# Altium PCB TempRFOut.PcbDoc
Units mm, origin at the board's own origin, x right, y up, seen from the top; angles counter-clockwise.
Board outline 8 x 31 mm, 4 copper layers (Top Layer, Internal 1, Internal 2, Bottom Layer), stack 1.604 mm thick; 7 components, 11 nets, 32 pads, 2 vias.
Unrouted connection lines stored in the file: 3.
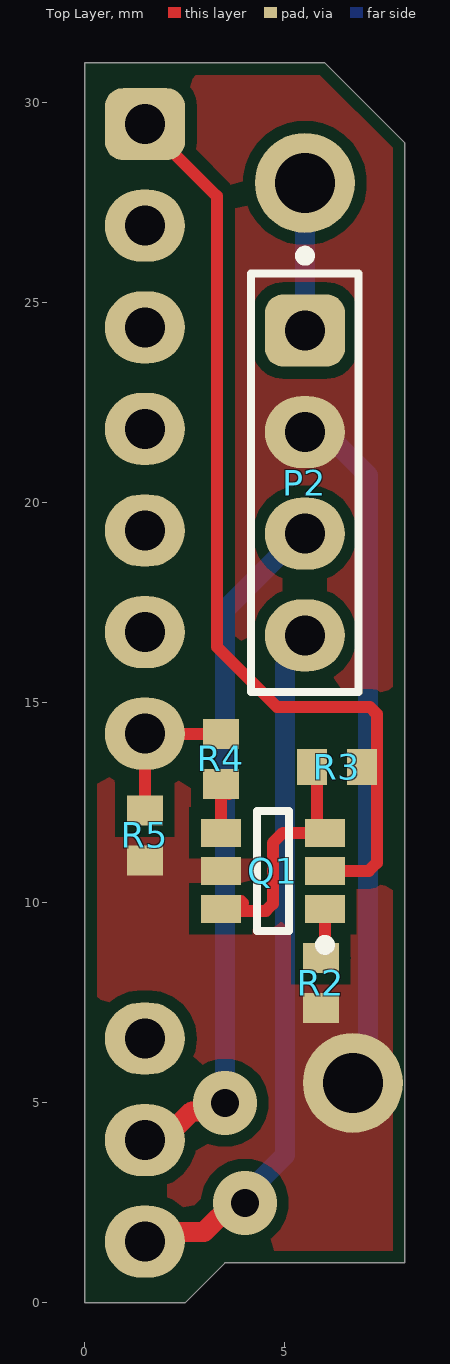
[diagram p0: Top Layer view]
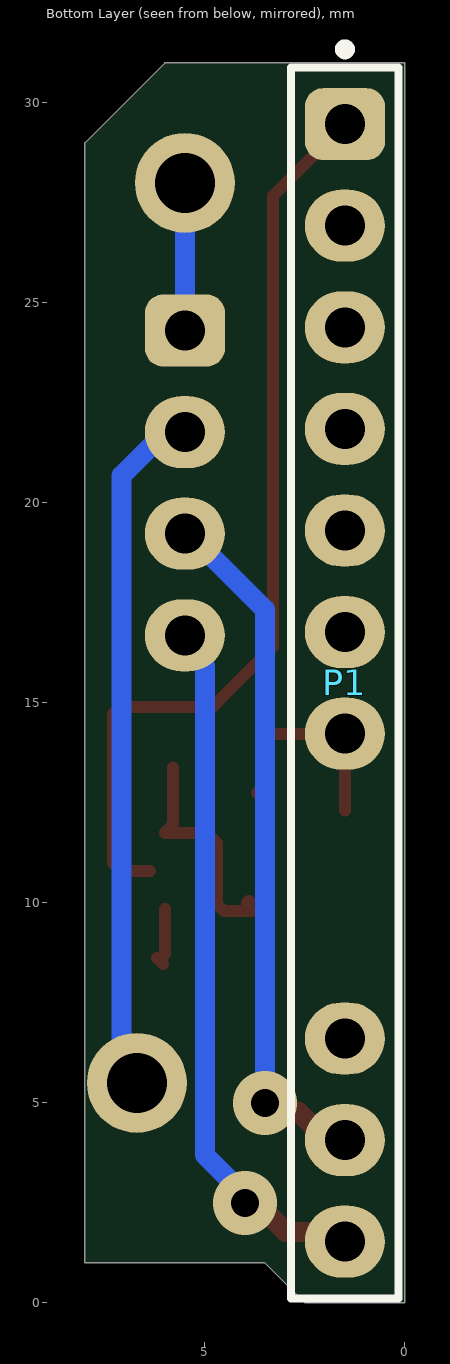
[diagram p1: Bottom Layer view, seen from below]

## Layer stack, top to bottom
Top Solder: solder mask 0.01, Solder Resist, Dk 3.5
Top Layer: signal copper 0.035
Dielectric 3: prepreg 0.075, PP-006, Dk 4.1
Internal 1: signal copper 0.017
Dielectric 1: dielectric 1.35, FR-4, Dk 4.8
Internal 2: signal copper 0.017
Dielectric 4: prepreg 0.075, PP-006, Dk 4.1
Bottom Layer: signal copper 0.035
Bottom Solder: solder mask 0.01, Solder Resist, Dk 3.5

## Board outline
2.5,0 3.5,1 8,1 8,29 6,31 0,31 0,0

## Design rules (kind name [scope] priority, off if disabled: settings)
BoardOutlineClearance [All] p1: gap=0.3 ignorepadtopadclearanceinfootprint=FALSE
Clearance Clearance_3 [All] p1: gap=0.2 ignorepadtopadclearanceinfootprint=FALSE except(0.3: Arc-Fill Arc-Poly Arc-Region Track-Fill Track-Poly Track-Region SMDPad-Fill SMDPad-Poly SMDPad-Region THPad-Fill THPad-Poly THPad-Region Via-Fill Via-Poly Via-Region Fill-Fill Fill-Poly Fill-Region Poly-Poly Poly-Region Region-Region)
ComponentClearance [All] p1: gap=0.1 collisioncheckmode=3 verticalgap=0.254 showdistances=FALSE
DiffPairsRouting [All] p1: maxlimit=0.254 minlimit=0.152 mostfreqgap=0.254 toplayer_prefgap=0.2 toplayer_minwidth=0.152 toplayer_maxwidth=0.381 toplayer_prefwidth=0.152 midlayer1_mingap=0.254 midlayer1_minwidth=0.381 midlayer1_maxwidth=0.381 midlayer1_prefwidth=0.381 midlayer2_mingap=0.254 midlayer2_minwidth=0.381 midlayer2_maxwidth=0.381 midlayer2_prefwidth=0.381 bottomlayer_prefgap=0.2 bottomlayer_minwidth=0.152 bottomlayer_maxwidth=0.381 bottomlayer_prefwidth=0.152 maxuncoupledlength=12.7
HoleSize [All] p1: absolutevalues=TRUE maxlimit=5 minlimit=0.025 maxpercent=80.000 minpercent=20.000
MinimumSolderMaskSliver [All] p1 off: minsoldermaskwidth=0.254
PasteMaskExpansion [All] p1: expansion=-0.05
PlaneClearance [All] p1: clearance=0.5
PlaneConnect [All] p1: planeconnectstyle=Direct reliefexpansion=0.508 reliefentries=4 reliefconductorwidth=0.254 reliefairgap=0.254
PolygonConnect [All] p1: connectstyle=Direct reliefconductorwidth=0.5 reliefentries=4 polygonreliefangle="90 Angle" airgapwidth=0.2
RoutingVias [All] p1: holewidth=0.3 width=0.6 viastyle="Through Hole" minholewidth=0.3 minwidth=0.52 maxholewidth=5 maxwidth=5
SilkToSilkClearance [All] p1 off: silktosilkclearance=0.254
SilkToSolderMaskClearance [IsPad] p1 off: minsilkscreentomaskgap=0.254 clearancetoexposedcopper=TRUE
SolderMaskExpansion [All] p1 off: expansion=0.102 istentingtop=FALSE
SupplyNets "Schematic Supply Nets_3" [InNet('VBAT')] p1: voltage=0.000
SupplyNets "Schematic Supply Nets_1" [InNet('3V3')] p2: voltage=0.000
SupplyNets "Schematic Supply Nets" [InNet('GND')] p3: voltage=0.000
UnRoutedNet [All] p1: checkbadconnections=TRUE
Width [All] p1: maxlimit=5 minlimit=0.3 preferedwidth=0.5
20 further rules are at their usual default settings.

## Components (designator, comment, footprint, x,y, rotation, side; value= is the part's Value field where it differs from the comment)
P1 "61301211121" 61301211121 1.5,15.5 r270 bottom
P2 "61300411121" 61300411121 5.5,20.5 r270 top
Q1 "DMC2700UDM-7" FAIR-SOT23-6_V 4.7,10.8 r180 top
R2 "120k" 0603 5.9,8 r90 top
R3 "120k" 0603 6.3,13.4 r0 top
R4 "15k" 0603 3.4,13.6 r270 top
R5 "15k" 0603 1.5,11.69 r90 top

## Footprints (in the part's own frame and the unit in brackets; to place one, negate y for a bottom-side part, rotate by r counter-clockwise, add the part's x,y. Pads: shape width x height; smd on the part's side, far side on the other; paste and mask are expansions set on the pad)
0603 [mm] "IPC High Density"
  rect 0.75x0.9 smd: 1(-0.625,0) 2(0.625,0)
  body extent -0.87,-0.48 0.87,0.48, height 0.92
61300411121 [mm] "Pin Header, pitch 2.54 mm, THT, Vertical, single row, 4p"
  rrect50% 1.8x2 hole 1: 1(-3.81,0)
  oval 1.8x2 hole 1: 2(-1.27,0) 3(1.27,0) 4(3.81,0)
  silkscreen extent -5.8,-1.35 5.23,1.35, body extent -5.08,-1.27 5.08,1.27, height 8.57
61301211121 [mm] "Pin Header, pitch 2.54 mm, THT, Vertical, single row, 12p"
  rrect50% 1.8x2 hole 1: 1(-13.97,0)
  oval 1.8x2 hole 1: 2(-11.43,0) 3(-8.89,0) 4(-6.35,0) 5(-3.81,0) 6(-1.27,0) 7(1.27,0) 10(8.89,0) 11(11.43,0) 12(13.97,0)
  round 0 all layers, no hole: 8(3.81,0) 9(6.35,0)
  silkscreen extent -15.96,-1.35 15.39,1.35, body extent -15.24,-1.27 15.24,1.27, height 8.57
FAIR-SOT23-6_V [mm] "SOT23, 6-Leads, Body 2.9x1.6mm, Pitch 0.95mm"
  rect 1x0.7 smd: 1(-1.3,0.95) 2(-1.3,0) 3(-1.3,-0.95) 4(1.3,-0.95) 5(1.3,0) 6(1.3,0.95)
  silkscreen extent -1.43,-1.5 0.4,1.97, body extent -1.4,-1.45 1.4,1.45, height 1.45

## Part data
P1: library part CMP-1502-01086-4, "THT Vertical Pin Header WR-PHD, Pitch 2.54 mm, Single Row, 12 pins", Color=Black, Contact Resistance=20mΩ, Current Rating=3A, Operating Supply Voltage=250V, Connector Type="Male Pin", Contact Material=Copper, Contact Mating Length=5.9944mm, Contact Plating=Gold, Gender=Male, Lead Pitch=2.54mm, Mount="Through Hole", Number of Contacts=12, Number of Pins=12, Number of Positions=12, Number of Rows=1, Orientation=Vertical, Packaging=Bulk, Pitch=2.54mm, RoHS=Compliant, Termination=Solder
P2: library part CMP-1502-01064-4, "THT Vertical Pin Header WR-PHD, Pitch 2.54 mm, Single Row, 4 pins", Color=Black, Contact Resistance=20mΩ, Current Rating=3A, Max Operating Temperature=105°C, Min Operating Temperature=-40°C, Operating Supply Voltage=250V, Connector Type="Male Pin", Contact Material=Gold, Contact Mating Length=5.9944mm, Contact Plating=Gold, Gender=Male, Height=8.89mm, Lead Free="Lead Free", Lead Pitch=2.54mm, Mount="Through Hole", Number of Contacts=4, Number of Pins=4, Number of Positions=4, Number of Rows=1, Orientation=Vertical, Packaging=Bulk, Pitch=2.54mm, RoHS=Compliant, Termination=Solder, Voltage Rating=250V
Q1: library part CMP-2000-04939-1, "Dual N & P-Channel 2.5 V Specified PowerTrench(TM) MOSFET, -55 to 150 degC, 6-Pin SOT-23, RoHS, Tape and Reel", Manufacturer=Fairchild, Maximum Continuous Drain Current=2.7@NChannel, Maximum Drain Source Voltage=20V, Maximum Gate Source Voltage=±8V, Operating Temperature=-55to150degC, Package=6SuperSOT, Package Description="6-Pin Small Outline Transistor, Body 2.9 x 1.6 mm, Pitch 0.95 mm", Package Reference=SOT23-6, Package Version="Rev. 5, 05/2015", Category=MOSFET, Channel Mode=Enhancement, Channel Type=N, Datasheet URL=https://www.fairchildsemi.com/datasheets/FD/FDC6327C.pdf, Datasheet Version="Rev. E, 07/2000", Manufacturer URL=https://www.fairchildsemi.com/, Mounting=SurfaceMount, Package URL=https://www.fairchildsemi.com/package-drawings/MA/MA06A.pdf, Packaging=Tape&Reel, Rad Hard=No, RDS-on=80@4.5V@NChannel, Typical Fall Time=3@NChannel, Typical Rise Time=9@NChannel, Typical Turn-Off Delay Time=12@NChannel, Typical Turn-On Delay Time=5@NChannel
R2 R3 R4 R5: library part R, "Resistor", ComponentLink1Description=http://www.yageo.com/documents/recent/PYu-RC_Group_51_RoHS_L_7.pdf, ComponentLink1URL=http://www.yageo.com/documents/recent/PYu-RC_Group_51_RoHS_L_7.pdf

## Free pads (board coordinates)
  round 2.5 hole 1.5: 10(5.5,28) 10(6.7,5.5)

## Via types
v1: diameter 1.6, hole 0.7, Top Layer to Bottom Layer, 2 vias

## Nets (pads, with @x,y where several pads share a name; then routed paths per layer and width w, separated by ;. In a path a pad name is that pad's centre, name@x,y a point inside that pad or via, vN(x,y) a via of type N, cw(c..) or ccw(c..) an arc to the next point about the centre after c; other vN are vias at no path point)
3V3: P2.1 pad.10@5.5,28 | length 3.7
  Bottom Layer w0.5: P2.1 pad.10@5.5,28
"5 ENABLE": P1.10 Q1.1 R2.2 | length 1.3
  Top Layer w0.3: R2.2@6,8.725 Q1.1 ; R2.2@6.05,8.475 R2.2@6.2,8.625
"5 LED": 
"10 A10": P1.7 R4.1 R5.2 | length 4
  Top Layer w0.3: R5.2 P1.7 1.502,14.228 3.598,14.228 R4.1@3.6,14.225
GND: P2.2 pad.10@6.7,5.5 Q1.5 R2.1 R5.1 | length 16.9
  Bottom Layer w0.5: P2.2@6,21.77 7.083,20.687 7.083,5.883 pad.10@6.7,5.5
NetD1_2: 
NetQ1_3: Q1.3 Q1.6 R3.1 | length 6
  Top Layer w0.3: Q1.6@3.45,9.8 4.524,9.8 4.7,9.976 4.7,11.5 4.95,11.75 5.6,11.75 Q1.3 5.8,11.95 R3.1@5.8,13.389 ; 3.9,10.05 3.95,10
NetQ1_4: Q1.4 R4.2 | length 1.7
  Top Layer w0.3: Q1.4 R4.2@3.4,12.75 ; R4.2@3.489,13.086 ccw(c3.746,12.931) 3.447,12.957 3.53,12.889 R4.2@3.6,12.832 ; R4.2@3.6,12.725 R4.2@3.6,12.832 ; R4.2@3.6,12.975 R4.2@3.6,12.832 ; R4.2@3.7,12.75 R4.2@3.6,12.832
SCL: P1.11 P2.3 | length 17.5
  Top Layer w0.5: P1.11 1.952,4.07 2.671,4.79 3.29,4.79 v1(3.5,5)
  Bottom Layer w0.5: v1(3.5,5) 3.5,17.33 5.4,19.23 P2.3
SDA: P1.12 P2.4 | length 17.9
  Top Layer w0.5: P1.12 1.749,1.779 2.981,1.779 3.702,2.5 v1(4,2.5)
  Bottom Layer w0.5: v1(4,2.5) 4,2.692 5,3.692 5,15.938 5.752,16.69 P2.4@5.798,16.69
VBAT: P1.1 Q1.2 R3.2 | length 23.2
  Top Layer w0.3: P1.1 3.3,27.67 3.3,16.4 4.8,14.9 7.124,14.9 7.3,14.724 7.3,11 7.1,10.8 Q1.2@6.377,10.8
pads on no net: P1.2 P1.3 P1.4 P1.5 P1.6 P1.8 P1.9

## Polygon pours and split planes (outlines as drawn)
GND on Top Layer "GND_L01_P000" (solid, remove dead copper, pour order 0): 0.055,30.79 0.265,31 10,31 10,-0.304 0.055,-0.39